# EAGLE board CT_schematic (EAGLE 7.6.0)

Size 100 x 80 mm. Coordinates in mm from the lower left corner, seen from the top.
Outline: 0,0 100,0 100,80 0,80 0,0
Copper layers (1*16): Top 0.035mm / dielectric 1.5mm / Bottom 0.035mm
Design rules "default": minimum track width 10mil, minimum drill 24mil, track to track 8mil, track to pad 8mil, pad to pad 8mil, via to via 8mil, smd to smd 8mil, copper to edge 40mil, drill to drill 8mil, minimum pad ring 10mil, minimum via ring 8mil, stop-mask expansion 4mil, vias tented up to drill 0mil, thermal gap 10mil

## Footprints (pad centres in the part's own frame; a part is rotated, then mirrored left to right if it is on the bottom)
C0603 = smd 0.8 x 0.8: 1 -0.762,0; 2 0.762,0
C0402 = smd 0.5 x 0.5: 1 -0.508,0; 2 0.508,0
C0805 = smd 1.2 x 1.3: 1 -1.016,0; 2 1.016,0
C1210 = smd 1.2 x 2.5: 1 -1.524,0; 2 1.524,0
R0603 = smd 0.8 x 0.8: 1 -0.762,0; 2 0.762,0
EXV-9H = smd 3.505 x 1.676: 1 -2.857,0; 2 2.857,0
L0603 = smd 0.8 x 0.8: 1 -0.762,0; 2 0.762,0
IND25X25CZ = smd 2.489 x 3.429: 1 -2.718,0; 2 2.718,0
DR1040 = smd 1.6 x 3.2: 1 -4.458,0; 2 4.458,0
PJ-037B_PACKAGE = drill 3.7 square: 1 12,0 | drill 3.2 square: 2 6,0
TFBGA100 = smd 0.4 x 0.4: A1 -3.6,3.6; A2 -2.8,3.6; A3 -2,3.6; A4 -1.2,3.6; A5 -0.4,3.6; A6 0.4,3.6; A7 1.2,3.6; A8 2,3.6; A9 2.8,3.6; A10 3.6,3.6; B1 -3.6,2.8; B2 -2.8,2.8; B3 -2,2.8; B4 -1.2,2.8; B5 -0.4,2.8; B6 0.4,2.8; B7 1.2,2.8; B8 2,2.8; B9 2.8,2.8; B10 3.6,2.8; C1 -3.6,2; C2 -2.8,2; C3 -2,2; C4 -1.2,2; C5 -0.4,2; C6 0.4,2; C7 1.2,2; C8 2,2; C9 2.8,2; C10 3.6,2; D1 -3.6,1.2; D2 -2.8,1.2; D3 -2,1.2; D4 -1.2,1.2; D5 -0.4,1.2; D6 0.4,1.2; D7 1.2,1.2; D8 2,1.2; D9 2.8,1.2; D10 3.6,1.2; E1 -3.6,0.4; E2 -2.8,0.4; E3 -2,0.4; E4 -1.2,0.4; E5 -0.4,0.4; E6 0.4,0.4; E7 1.2,0.4; E8 2,0.4; E9 2.8,0.4; E10 3.6,0.4; F1 -3.6,-0.4; F2 -2.8,-0.4; F3 -2,-0.4; F4 -1.2,-0.4; F5 -0.4,-0.4; F6 0.4,-0.4; F7 1.2,-0.4; F8 2,-0.4; F9 2.8,-0.4; F10 3.6,-0.4; G1 -3.6,-1.2; G2 -2.8,-1.2; G3 -2,-1.2; G4 -1.2,-1.2; G5 -0.4,-1.2; G6 0.4,-1.2; G7 1.2,-1.2; G8 2,-1.2; G9 2.8,-1.2; G10 3.6,-1.2; H1 -3.6,-2; H2 -2.8,-2; H3 -2,-2; H4 -1.2,-2; H5 -0.4,-2; H6 0.4,-2; H7 1.2,-2; H8 2,-2; H9 2.8,-2; H10 3.6,-2; J1 -3.6,-2.8; J2 -2.8,-2.8; J3 -2,-2.8; J4 -1.2,-2.8; J5 -0.4,-2.8; J6 0.4,-2.8; J7 1.2,-2.8; J8 2,-2.8; J9 2.8,-2.8; J10 3.6,-2.8; K1 -3.6,-3.6; K2 -2.8,-3.6; K3 -2,-3.6; K4 -1.2,-3.6; K5 -0.4,-3.6; K6 0.4,-3.6; K7 1.2,-3.6; K8 2,-3.6; K9 2.8,-3.6; K10 3.6,-3.6
10100565 = smd 0.8 x 2.35: 1 0,0; 2 1.25,0; 3 2.55,0; 4 4.25,0; 5 5.43,0; 6 6.68,0; 7 7.93,0; 8 9.18,0; 9 11.67,0; 10 14.18,0; 11 15.43,0; 12 16.68,0; 13 17.93,0; 14 19.18,0; 15 21.68,0 | smd 1.5 x 3.1: 16 23.495,-1.375; 20 25.685,-22.875 | smd 1.55 x 3.1: 17 -1.815,-1.375; 21 -1.815,-22.875 | drill 1.1 pad 1.1: 18 21.68,-2.375; 19 0.68,-2.375
SI7034-A10-IM = smd 0.75 x 0.4: 1 -1,0.5; 2 -1,-0.5; 4 1,-0.5; 5 1,0.5 | smd 0.8 x 1.7: 3 0,0
WFDN-8 = smd 0.48 x 0.7: 1 0,0; 2 1.27,0; 3 2.54,0; 4 3.81,0; 5 3.81,4.45; 6 2.54,4.45; 7 1.27,4.45; 8 0,4.45 | smd 4 x 3: 9 1.89,2.25
ASEK = smd 1.4 x 1: 1 -1.1,-0.8; 2 1.1,-0.8; 3 1.1,0.8; 4 -1.1,0.8
ASFL1 = smd 1.7 x 1.5: 1 -1.27,-1.1; 2 1.27,-1.1; 3 1.27,1.1; 4 -1.27,1.1
IR3899MTR1PBF = smd 0.25 x 0.75: 1 0,0; 2 0.5,0; 3 1,0; 4 1.5,0; 5 2,0; 6 2.5,0; 7 3,0 | smd 0.75 x 0.25: 8 3.425,0.78; 9 3.425,1.28; 10 3.425,1.78; 14 -0.425,1.78; 15 -0.425,1.28; 16 -0.425,0.78 | smd 0.3 x 1.95: 11 3.22,3.63 | smd 1.62 x 2.42: 12 1.786,3.8 | smd 1 x 1.95: 13 0.117,3.63 | smd 2.19 x 1.25: 17 1.51,1.26
HTSSOP14 = smd 1.676 x 0.356: 1 -2.8,1.95; 2 -2.8,1.3; 3 -2.8,0.65; 4 -2.8,0; 5 -2.8,-0.65; 6 -2.8,-1.3; 7 -2.8,-1.95; 8 2.8,-1.95; 9 2.8,-1.3; 10 2.8,-0.65; 11 2.8,0; 12 2.8,0.65; 13 2.8,1.3; 14 2.8,1.95 | smd 3 x 5: 15 0,0 | drill 0.4 pad 0.45: P$1 -0.75,1.5; P$2 0.75,1.5; P$3 -0.75,0; P$4 0.8,0; P$5 -0.75,-1.5; P$6 0.9,-1.5
WSON-8 = smd 0.3 x 0.6: 1 -0.75,0; 2 0.05,0; 3 0.85,0; 4 1.65,0; 5 1.65,3.8; 6 0.85,3.8; 7 0.05,3.8; 8 -0.75,3.8 | smd 3 x 2.6: PAD 0.45,1.9
QFN-38_UHF = smd 0.75 x 0.3: 1 -2.4,2.75; 2 -2.4,2.25; 3 -2.4,1.75; 4 -2.4,1.25; 6 -2.4,0.25; 7 -2.4,-0.25; 8 -2.4,-0.75; 9 -2.4,-1.25; 10 -2.4,-1.75; 11 -2.4,-2.25; 12 -2.4,-2.75; 20 2.4,-2.75; 21 2.4,-2.25; 22 2.4,-1.75; 23 2.4,-1.25; 24 2.4,-0.75; 25 2.4,-0.25; 26 2.4,0.25; 27 2.4,0.75; 28 2.4,1.25; 29 2.4,1.75; 30 2.4,2.25; 31 2.4,2.75 | smd 0.758 x 0.3: 5 -2.4,0.75 | smd 0.3 x 0.75: 13 -1.5,-3.4; 14 -1,-3.4; 15 -0.5,-3.4; 16 0,-3.4; 17 0.5,-3.4; 18 1,-3.4; 19 1.5,-3.4; 32 1.5,3.4; 33 1,3.4; 34 0.5,3.4; 35 0,3.4; 36 -0.5,3.4; 37 -1,3.4; 38 -1.5,3.4 | smd 3.2 x 5.2: 39 0,0
IRF8306MTRPBF = smd 0.9 x 1.85: 1 0,0; 2 0,-2.35; 6 6.4,0; 7 6.4,-2.35 | smd 0.75 x 0.75: 3 1.75,-1.175 | smd 1.45 x 0.87: 4 3.5,-0.565; 5 3.5,-1.785
SW_4-1437565-2 = smd 1.4 x 2.1: 1 -2.23,4.55; 2 -2.23,-4.55; 3 2.23,4.55; 4 2.23,-4.55
LGM67K-G1J2-24-Z = smd 0.8 x 1.4: A -2,0; C 0,0
NC7SZ125M5X = smd 1.3 x 0.7: 1 -1.3,0.95; 2 -1.3,0; 3 -1.3,-0.95; 4 1.3,-0.95; 5 1.3,0.95

## Placement (x,y rotation side)
C1  1e-06  [C0603]  -44.45,92.71 0 top  (outside the outline)
C2  1e-07  [C0603]  -48.26,92.71 0 top  (outside the outline)
C3  1e-07  [C0603]  -52.07,92.71 0 top  (outside the outline)
C4  1e-07  [C0603]  -55.88,92.71 0 top  (outside the outline)
C5  1e-07  [C0603]  -59.69,92.71 0 top  (outside the outline)
C6  1e-07  [C0603]  -63.5,92.71 0 top  (outside the outline)
C7  4.7e-06  [C0603]  -29.21,92.71 0 top  (outside the outline)
C8  1e-08  [C0603]  -67.31,92.71 0 top  (outside the outline)
C9  1e-06  [C0603]  -71.12,92.71 0 top  (outside the outline)
C10  1e-07  [C0603]  -74.93,92.71 0 top  (outside the outline)
C11  1e-07  [C0603]  -78.74,92.71 0 top  (outside the outline)
C12  1e-07  [C0603]  -82.55,92.71 0 top  (outside the outline)
C13  1e-07  [C0402]  -58.42,97.79 0 top  (outside the outline)
C14  1e-05  [C0805]  -21.59,71.12 0 top  (outside the outline)
C15  1e-07  [C0402]  -62.23,97.79 0 top  (outside the outline)
C16  1e-07  [C0402]  -66.04,97.79 0 top  (outside the outline)
C17  1e-08  [C0402]  -69.85,97.79 0 top  (outside the outline)
C18  1e-08  [C0402]  -73.66,97.79 0 top  (outside the outline)
C19  0.0001  [C1210]  -46.99,63.5 0 top  (outside the outline)
C20  2.2e-06  [C0603]  -33.02,92.71 0 top  (outside the outline)
C21  1e-07  [C0402]  -77.47,97.79 0 top  (outside the outline)
C22  1e-07  [C0402]  -81.28,97.79 0 top  (outside the outline)
C23  8.6453388913681e-09  [R0603]  -31.75,71.12 0 top  (outside the outline)
C24  2.9472746220573e-07  [R0603]  -41.91,71.12 0 top  (outside the outline)
C27  1e-06  [C0603]  -86.36,92.71 0 top  (outside the outline)
C28  3.3e-09  [C0402]  -54.61,97.79 0 top  (outside the outline)
C29  1e-07  [C0402]  -85.09,97.79 0 top  (outside the outline)
C30  2.2e-05  [C1210]  -53.34,63.5 0 top  (outside the outline)
C31  2.2e-05  [C1210]  -59.69,63.5 0 top  (outside the outline)
C32  1e-05  [C1210]  -66.04,63.5 0 top  (outside the outline)
C33  1e-05  [C1210]  -72.39,63.5 0 top  (outside the outline)
C34  8e-07  [R0603]  -15.24,97.79 0 top  (outside the outline)
C35  1e-05  [C1210]  -78.74,63.5 0 top  (outside the outline)
C36  0.0001  [C1210]  -85.09,63.5 0 top  (outside the outline)
C37  2.2e-06  [C0603]  -36.83,92.71 0 top  (outside the outline)
C38  1e-07  [C0402]  -88.9,97.79 0 top  (outside the outline)
C39  1e-07  [C0402]  -15.24,102.87 0 top  (outside the outline)
C40  8.6453388913681e-09  [R0603]  -52.07,71.12 0 top  (outside the outline)
C41  2.9472746220573e-07  [R0603]  -62.23,71.12 0 top  (outside the outline)
C44  1e-07  [C0402]  -19.05,102.87 0 top  (outside the outline)
C45  2.2e-06  [C0603]  -40.64,92.71 0 top  (outside the outline)
C46  2.45e-08  [R0603]  -86.36,82.55 0 top  (outside the outline)
C47  2.8258362168397e-09  [R0603]  -72.39,71.12 0 top  (outside the outline)
C48  7.105e-09  [R0603]  -74.93,77.47 0 top  (outside the outline)
C49  0.0001  [EXV-9H]  -64.77,55.88 0 top  (outside the outline)
C50  0.0001  [EXV-9H]  -76.2,55.88 0 top  (outside the outline)
C51  1e-08  [C0402]  -22.86,102.87 0 top  (outside the outline)
F1  240.0  [L0603]  -19.05,97.79 0 top  (outside the outline)
I1  6.8e-07  [IND25X25CZ]  -86.36,55.88 0 top  (outside the outline)
I2  7e-06  [DR1040]  -38.1,35.56 0 top  (outside the outline)
I3  6.8e-07  [IND25X25CZ]  -17.78,64.77 0 top  (outside the outline)
J1  PJ-037B  [PJ-037B_PACKAGE]  -76.2,7.62 0 top  (outside the outline)
R2  1000.0  [R0603]  -22.86,97.79 0 top  (outside the outline)
R7  4700.0  [R0603]  -26.67,97.79 0 top  (outside the outline)
R8  2200.0  [R0603]  -30.48,97.79 0 top  (outside the outline)
R10  2200.0  [R0603]  -34.29,97.79 0 top  (outside the outline)
R12  10000.0  [R0603]  -15.24,87.63 0 top  (outside the outline)
R13  10000.0  [R0603]  -20.32,87.63 0 top  (outside the outline)
R14  10000.0  [R0603]  -25.4,87.63 0 top  (outside the outline)
R15  100000.0  [R0603]  -80.01,77.47 0 top  (outside the outline)
R16  100000.0  [R0603]  -85.09,77.47 0 top  (outside the outline)
R17  100000.0  [R0603]  -15.24,82.55 0 top  (outside the outline)
R18  100000.0  [R0603]  -20.32,82.55 0 top  (outside the outline)
R19  100000.0  [R0603]  -25.4,82.55 0 top  (outside the outline)
R20  100000.0  [R0603]  -30.48,82.55 0 top  (outside the outline)
R21  100000.0  [R0603]  -35.56,82.55 0 top  (outside the outline)
R22  100000.0  [R0603]  -40.64,82.55 0 top  (outside the outline)
R23  100000.0  [R0603]  -45.72,82.55 0 top  (outside the outline)
R24  100000.0  [R0603]  -50.8,82.55 0 top  (outside the outline)
R25  100000.0  [R0603]  -55.88,82.55 0 top  (outside the outline)
R26  100000.0  [R0603]  -60.96,82.55 0 top  (outside the outline)
R27  100000.0  [R0603]  -66.04,82.55 0 top  (outside the outline)
R28  100000.0  [R0603]  -71.12,82.55 0 top  (outside the outline)
R29  0.1  [R0603]  -38.1,97.79 0 top  (outside the outline)
R30  4030.2416170974  [R0603]  -80.01,71.12 0 top  (outside the outline)
R31  2878.7440122125  [R0603]  -87.63,71.12 0 top  (outside the outline)
R32  58.964311377246  [R0603]  -19.05,77.47 0 top  (outside the outline)
R33  130.0  [R0603]  -41.91,97.79 0 top  (outside the outline)
R34  39000.0  [R0603]  -30.48,87.63 0 top  (outside the outline)
R35  49900.0  [R0603]  -35.56,87.63 0 top  (outside the outline)
R36  5181.6688741722  [R0603]  -26.67,77.47 0 top  (outside the outline)
R37  30000.0  [R0603]  -40.64,87.63 0 top  (outside the outline)
R38  22000.0  [R0603]  -45.72,87.63 0 top  (outside the outline)
R39  100000.0  [R0603]  -76.2,82.55 0 top  (outside the outline)
R40  153694.38  [R0603]  -69.85,77.47 0 top  (outside the outline)
R41  100000.0  [R0603]  -81.28,82.55 0 top  (outside the outline)
R42  0.1  [R0603]  -45.72,97.79 0 top  (outside the outline)
R43  4030.2416170974  [R0603]  -34.29,77.47 0 top  (outside the outline)
R44  2878.7440122125  [R0603]  -41.91,77.47 0 top  (outside the outline)
R45  58.964311377246  [R0603]  -49.53,77.47 0 top  (outside the outline)
R46  130.0  [R0603]  -49.53,97.79 0 top  (outside the outline)
R47  39000.0  [R0603]  -50.8,87.63 0 top  (outside the outline)
R48  49900.0  [R0603]  -55.88,87.63 0 top  (outside the outline)
R49  5181.6688741722  [R0603]  -57.15,77.47 0 top  (outside the outline)
R50  10000.0  [R0603]  -60.96,87.63 0 top  (outside the outline)
R51  75000.0  [R0603]  -66.04,87.63 0 top  (outside the outline)
R52  10000.0  [R0603]  -71.12,87.63 0 top  (outside the outline)
R53  10000.0  [R0603]  -76.2,87.63 0 top  (outside the outline)
R54  95300.0  [R0603]  -81.28,87.63 0 top  (outside the outline)
R55  95300.0  [R0603]  -86.36,87.63 0 top  (outside the outline)
R56  10000.0  [R0603]  -15.24,92.71 0 top  (outside the outline)
R57  10000.0  [R0603]  -20.32,92.71 0 top  (outside the outline)
R58  10000.0  [R0603]  -25.4,92.71 0 top  (outside the outline)
R59  138981.81818182  [R0603]  -64.77,77.47 0 top  (outside the outline)
U1  STM32F745VGH6  [TFBGA100]  -55.88,7.62 0 top  (outside the outline)
U2  10100565  [10100565]  -40.64,25.4 0 top  (outside the outline)
U3  Si7034-A10-IM  [SI7034-A10-IM]  -26.67,101.6 0 top  (outside the outline)
U4  SST26WF016B-104I/MF  [WFDN-8]  -31.75,44.45 0 top  (outside the outline)
U5  ASEK-32.768KHz-ECST  [ASEK]  -55.88,55.88 0 top  (outside the outline)
U6  ASFL1-25MHZ-NCS  [ASFL1]  -26.67,55.88 0 top  (outside the outline)
U7  IR3899MTR1PBF  [IR3899MTR1PBF]  -55.88,33.02 0 top  (outside the outline)
U8  tps54225PWP  [HTSSOP14]  -26.67,63.5 0 top  (outside the outline)
U9  LP2951ACSDX/NOPB  [WSON-8]  -80.01,44.45 0 top  (outside the outline)
U10  IR3899MTR1PBF  [IR3899MTR1PBF]  -71.12,33.02 0 top  (outside the outline)
U11  LTC2928CUHF#PBF  [QFN-38_UHF]  -34.29,55.88 0 top  (outside the outline)
U12  IRF8306MTRPbF  [IRF8306MTRPBF]  -46.99,46.99 0 top  (outside the outline)
U13  IRF8306MTRPbF  [IRF8306MTRPBF]  -62.23,46.99 0 top  (outside the outline)
U14  4-1437565-2  [SW_4-1437565-2]  -27.94,35.56 0 top  (outside the outline)
U15  Q65110A2395  [LGM67K-G1J2-24-Z]  -35.56,63.5 0 top  (outside the outline)
U16  nc7sz125m5x  [NC7SZ125M5X]  -15.24,71.12 0 top  (outside the outline)

## Library data of the parts
C1-C24 C27-C41 C44-C51 F1 I1-I3 J1 R2 R7 R8 R10 R12-R59 U1-U16 = circuit_tree

## Nets
CLK_U1_A1: U1.A1 U5.3
CLK_U1_C1: U1.C1 U6.3
GND: C1.2 C2.2 C3.2 C4.2 C5.2 C6.2 C7.2 C8.2 C9.2 C10.2 C11.2 C12.2 C13.2 C14.2 C15.2 C16.2 C17.2 C18.2 C20.2 C21.2 C22.2 C27.2 C28.2 C30.2 C31.2 C32.2 C33.2 C34.2 C35.2 C37.2 C38.2 C39.2 C44.2 C45.2 C46.2 C47.2 C48.2 C49.2 C50.2 C51.2 J1.2 R2.2 R12.2 R29.1 R29.2 R31.2 R34.2 R36.2 R38.2 R41.2 R42.1 R42.2 R44.2 R47.2 R49.2 R51.2 R54.2 R55.2 R56.2 R57.2 R58.2 U1.C2 U1.E4 U1.E5 U1.G1 U1.J1 U2.6 U2.10 U2.12 U2.16 U2.17 U2.20 U2.21 U3.5 U4.4 U4.9 U5.2 U6.2 U7.4 U7.11 U7.17 U8.5 U8.8 U8.9 U8.15 U9.3 U9.4 U9.PAD U10.4 U10.11 U10.17 U11.8 U11.9 U11.10 U11.12 U11.13 U11.24 U11.25 U11.30 U11.32 U11.39 U15.C U16.1 U16.3
NET_U1_D5: R12.1 U1.D5
NET_U1_E1: R7.1 U1.E1 U16.4
NET_U1_E6: R14.1 U1.E6
NET_U1_E7: C12.1 U1.E7
NET_U1_F7: R13.1 U1.F7
NET_U1_H1: C8.1 C9.1 F1.1 U1.H1
NET_U1_J7: R8.1 U1.J7 U3.2
NET_U1_K7: R10.1 U1.K7 U3.4
NET_U1_K8: U15.A
NET_U1_K9: U14.3 U14.4
NET_U2_1: R17.1 U2.1
NET_U2_2: R16.1 U2.2
NET_U2_18: U2.18 U2.19
NET_U7_1: C23.1 R30.1 R31.1 R32.1 R33.1 U7.1 U7.8
NET_U7_2: C22.1 U7.2
NET_U7_3: C23.2 C24.1 C24.2 U7.3
NET_U7_5: R34.1 U7.5
NET_U7_10: C20.1 U7.10
NET_U7_12: C19.1 I1.1 U7.12
NET_U7_13: U7.13
NET_U7_14: C19.2 U7.14
NET_U7_15: R35.1 R36.1 U7.15
NET_U7_ATNET_3: I1.2 R30.2
NET_U7_ATNET_4: C24.2 R32.2
NET_U7_ATNET_5: R33.2
NET_U8_2: R37.2 R38.1 U8.2
NET_U8_3: C27.1 U8.3
NET_U8_4: C28.1 U8.4
NET_U8_10: C29.1 I2.1 U8.10 U8.11
NET_U8_12: C29.2 U8.12
NET_U9_5: R39.1 U9.5
NET_U9_7: R40.2 R41.1 U9.7
NET_U10_1: C40.1 R43.1 R44.1 R45.1 R46.1 U10.1 U10.8
NET_U10_2: C39.1 U10.2
NET_U10_3: C40.2 C41.1 C41.2 U10.3
NET_U10_5: R47.1 U10.5
NET_U10_10: C37.1 U10.10
NET_U10_12: C36.1 I3.1 U10.12
NET_U10_13: U10.13
NET_U10_14: C36.2 U10.14
NET_U10_15: R48.1 R49.1 U10.15
NET_U10_ATNET_3: I3.2 R43.2
NET_U10_ATNET_4: C41.2 R45.2
NET_U10_ATNET_5: R46.2
NET_U11_3: R57.1 U11.3
NET_U11_6: R54.1 U11.6
NET_U11_7: R55.1 U11.7
NET_U11_16: R56.1 R59.1 U11.16
NET_U11_18: R53.1 U11.18
NET_U11_19: R52.1 U11.19 U11.20
NET_U11_21: R50.1 R51.1 U11.21 U16.2
NET_U11_26: C47.1 U11.26
NET_U11_27: C46.1 U11.27
NET_U11_28: C48.1 U11.28
NET_U11_38: R58.1 U11.38
NET_U12_3: U11.2 U12.3
NET_U13_3: U11.37 U13.3
NET_U14_1: R2.1 U14.1 U14.2
PROC_QUADSPI_BK1_IO0: U1.G9 U4.5
PROC_QUADSPI_BK1_IO1: U1.K10 U4.2
PROC_QUADSPI_BK1_IO2: R27.1 U1.A3 U4.3
PROC_QUADSPI_BK1_IO3: R28.1 U1.H2 U4.7
PROC_QUADSPI_BK1_NCS: R26.1 U1.B5 U4.1
PROC_QUADSPI_CLK: U1.G5 U4.6
PROC_SDMMC1_CK: R15.1 U1.C8 U2.8
PROC_SDMMC1_D0: R18.1 U1.F9 U2.4
PROC_SDMMC1_D1: R19.1 U1.E9 U2.3
PROC_SDMMC1_D2: R20.1 U1.B9 U2.15
PROC_SDMMC1_D3: R21.1 U1.B8 U2.14
PROC_SDMMC1_D4: R22.1 U1.B4 U2.13
PROC_SDMMC1_D5: R23.1 U1.A4 U2.11
PROC_SDMMC1_D6: R24.1 U1.F10 U2.7
PROC_SDMMC1_D7: R25.1 U1.E10 U2.5
VCC_16V7: C44.1 C45.1 C49.1 C50.1 J1.1 R50.2 R52.2 R53.2 R59.2 U11.11 U11.22 U12.1 U12.2 U12.6 U12.7 U13.1 U13.2 U13.6 U13.7
VCC_S1_16V7: C21.1 C32.1 C33.1 C34.1 R35.2 U7.9 U8.7 U8.13 U8.14 U9.8 U12.4 U12.5
VCC_S2_16V7: C38.1 R48.2 U10.9 U13.4 U13.5
VCC_TIER1_1V2: C11.1 I1.2 R30.2 U1.F8
VCC_TIER1_1V8: C1.1 C2.1 C3.1 C4.1 C5.1 C6.1 C7.1 C13.1 C14.1 C15.1 C16.1 C30.1 C31.1 C51.1 F1.2 I2.2 R7.2 R8.2 R10.2 R13.2 R14.2 R15.2 R16.2 R17.2 R18.2 R19.2 R20.2 R21.2 R22.2 R23.2 R24.2 R25.2 R26.2 R27.2 R28.2 R37.1 U1.B2 U1.D2 U1.F4 U1.F5 U1.K1 U2.9 U3.1 U4.8 U8.1 U16.5
VCC_TIER1_3V3: C10.1 C17.1 C18.1 C35.1 R39.2 R40.1 U1.F6 U5.4 U6.4 U9.1
VCC_TIER2_1V2: I3.2 R43.2

## Tracks (layer width: path | path; a pad name or v marks a point on that pad's centre or on a via)
CLK_U1_A1  (1 unrouted)
CLK_U1_C1  (1 unrouted)
GND  (103 unrouted)
NET_U1_D5  (1 unrouted)
NET_U1_E1  (2 unrouted)
NET_U1_E6  (1 unrouted)
NET_U1_E7  (1 unrouted)
NET_U1_F7  (1 unrouted)
NET_U1_H1  (3 unrouted)
NET_U1_J7  (2 unrouted)
NET_U1_K7  (2 unrouted)
NET_U1_K9  (1 unrouted)
NET_U2_1  (1 unrouted)
NET_U2_2  (1 unrouted)
NET_U2_18  (1 unrouted)
NET_U7_1  (6 unrouted)
NET_U7_2  (1 unrouted)
NET_U7_3  (3 unrouted)
NET_U7_5  (1 unrouted)
NET_U7_10  (1 unrouted)
NET_U7_12  (2 unrouted)
NET_U7_14  (1 unrouted)
NET_U7_15  (2 unrouted)
NET_U7_ATNET_3  (1 unrouted)
NET_U7_ATNET_4  (1 unrouted)
NET_U8_2  (2 unrouted)
NET_U8_3  (1 unrouted)
NET_U8_4  (1 unrouted)
NET_U8_10  (3 unrouted)
NET_U8_12  (1 unrouted)
NET_U9_5  (1 unrouted)
NET_U9_7  (2 unrouted)
NET_U10_1  (6 unrouted)
NET_U10_2  (1 unrouted)
NET_U10_3  (3 unrouted)
NET_U10_5  (1 unrouted)
NET_U10_10  (1 unrouted)
NET_U10_12  (2 unrouted)
NET_U10_14  (1 unrouted)
NET_U10_15  (2 unrouted)
NET_U10_ATNET_3  (1 unrouted)
NET_U10_ATNET_4  (1 unrouted)
NET_U11_3  (1 unrouted)
NET_U11_6  (1 unrouted)
NET_U11_7  (1 unrouted)
NET_U11_16  (2 unrouted)
NET_U11_18  (1 unrouted)
NET_U11_19  (2 unrouted)
NET_U11_21  (3 unrouted)
NET_U11_26  (1 unrouted)
NET_U11_27  (1 unrouted)
NET_U11_28  (1 unrouted)
NET_U11_38  (1 unrouted)
NET_U12_3  (1 unrouted)
NET_U13_3  (1 unrouted)
NET_U14_1  (2 unrouted)
PROC_QUADSPI_BK1_IO0  (1 unrouted)
PROC_QUADSPI_BK1_IO1  (1 unrouted)
PROC_QUADSPI_BK1_IO2  (2 unrouted)
PROC_QUADSPI_BK1_IO3  (2 unrouted)
PROC_QUADSPI_BK1_NCS  (2 unrouted)
PROC_QUADSPI_CLK  (1 unrouted)
PROC_SDMMC1_CK  (2 unrouted)
PROC_SDMMC1_D0  (2 unrouted)
PROC_SDMMC1_D1  (2 unrouted)
PROC_SDMMC1_D2  (2 unrouted)
PROC_SDMMC1_D3  (2 unrouted)
PROC_SDMMC1_D4  (2 unrouted)
PROC_SDMMC1_D5  (2 unrouted)
PROC_SDMMC1_D6  (2 unrouted)
PROC_SDMMC1_D7  (2 unrouted)
VCC_16V7  (18 unrouted)
VCC_S1_16V7  (11 unrouted)
VCC_S2_16V7  (4 unrouted)
VCC_TIER1_1V2  (3 unrouted)
VCC_TIER1_1V8  (45 unrouted)
VCC_TIER1_3V3  (9 unrouted)
VCC_TIER2_1V2  (1 unrouted)